# Altium PCB PrimaveraVertical.PcbDoc
Units mm, origin at the board's own origin, x right, y up, seen from the top; angles counter-clockwise.
Board outline 50 x 101.5 mm, 2 copper layers (Top Layer, Bottom Layer); 11 components, 12 nets, 77 pads, 0 vias.
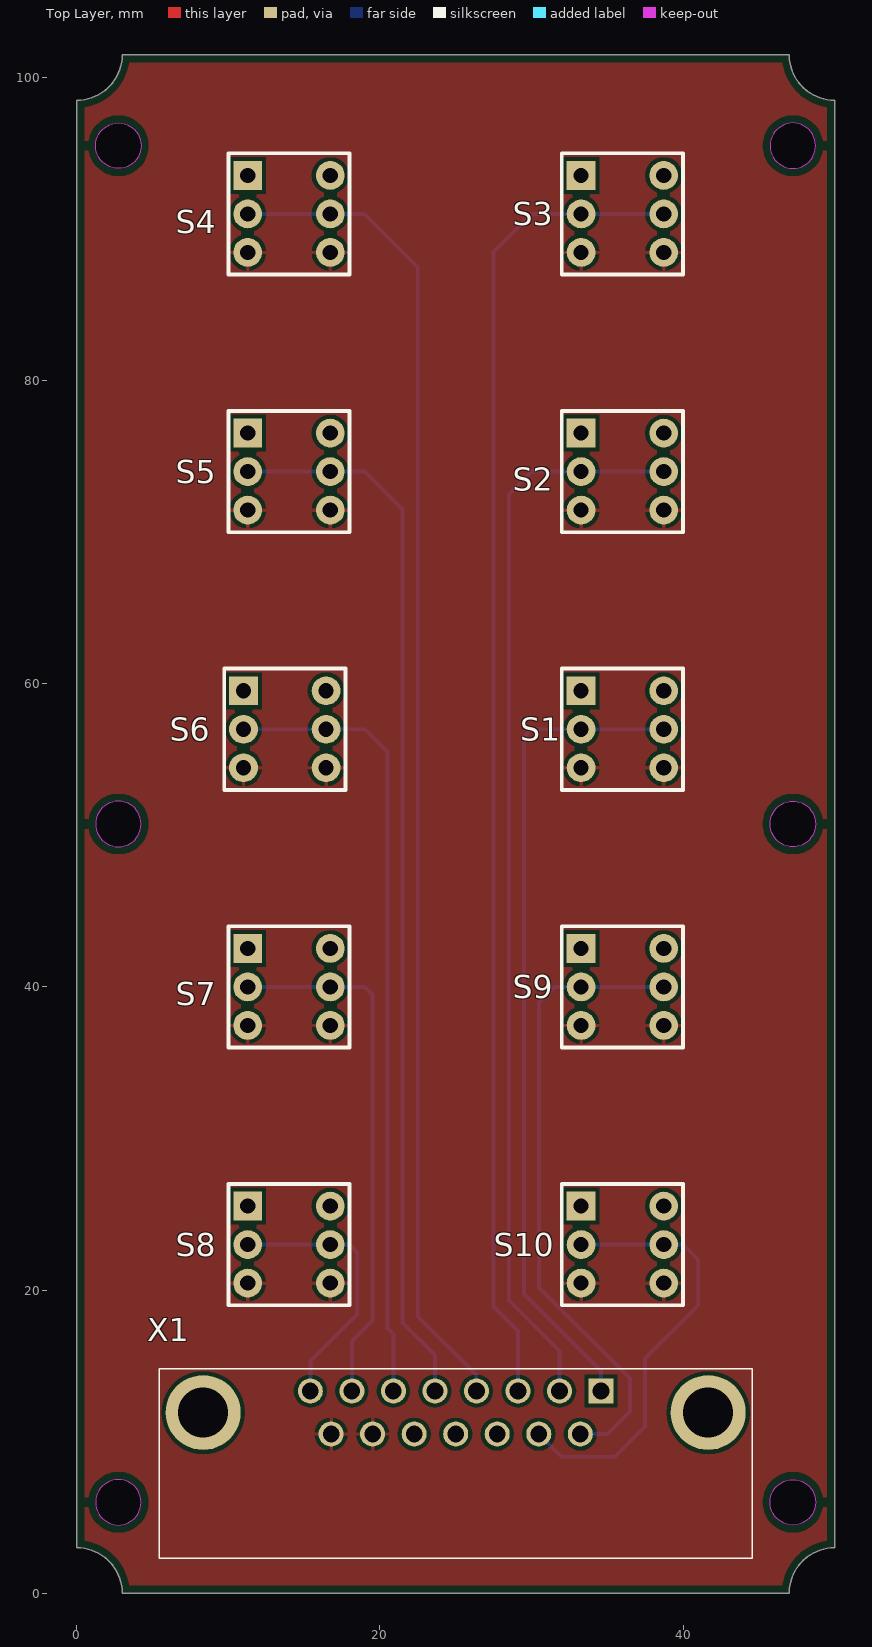
[diagram p0: Top Layer view]
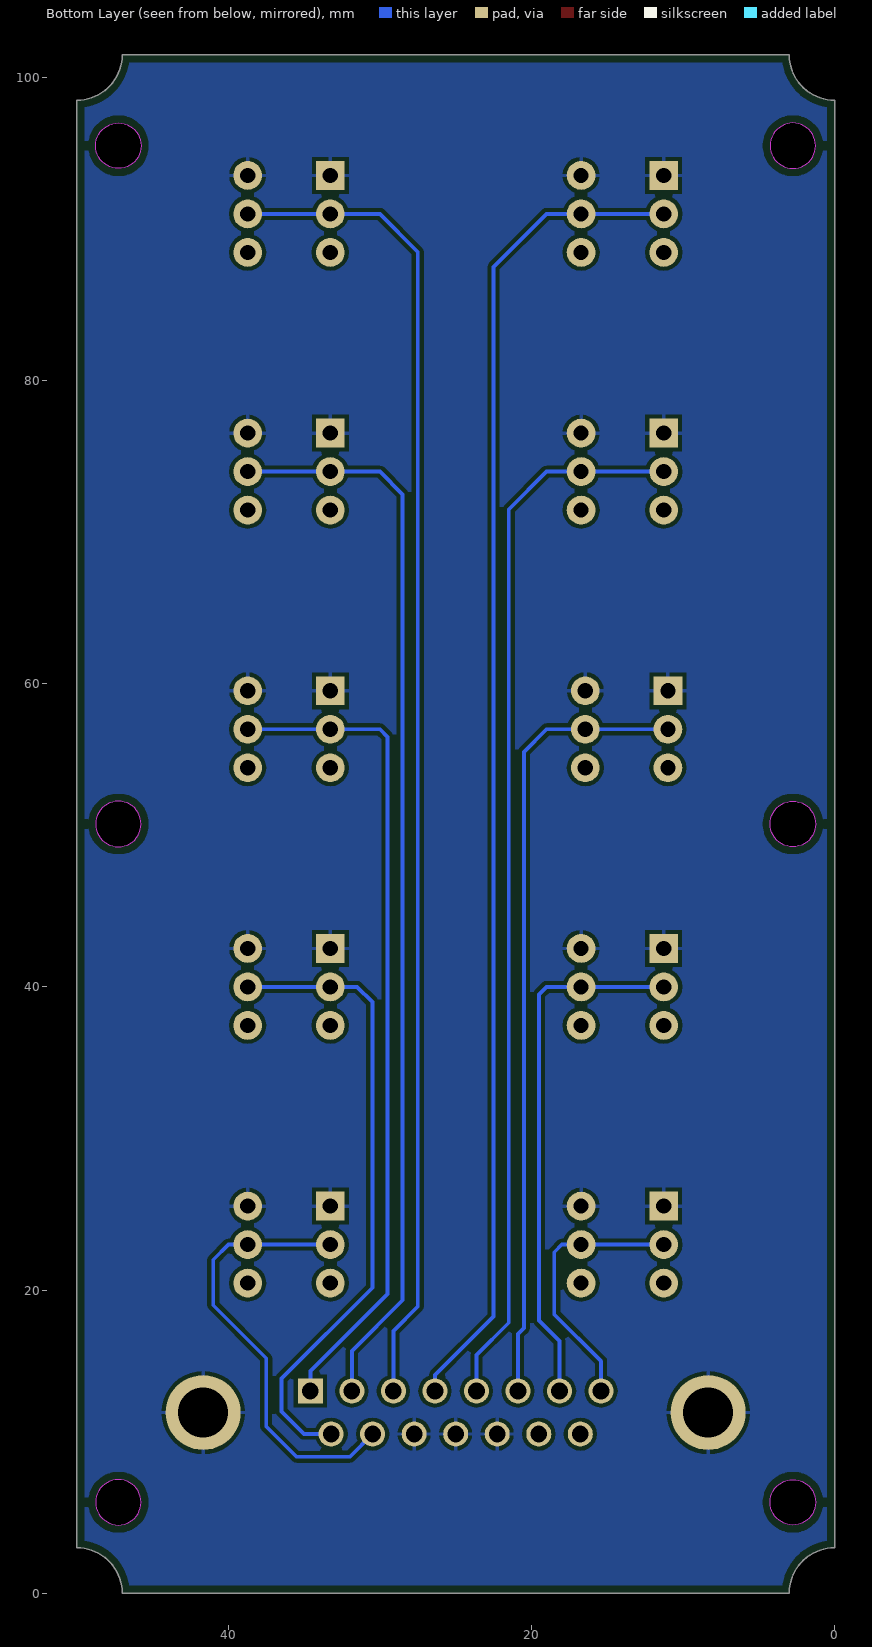
[diagram p1: Bottom Layer view, seen from below]
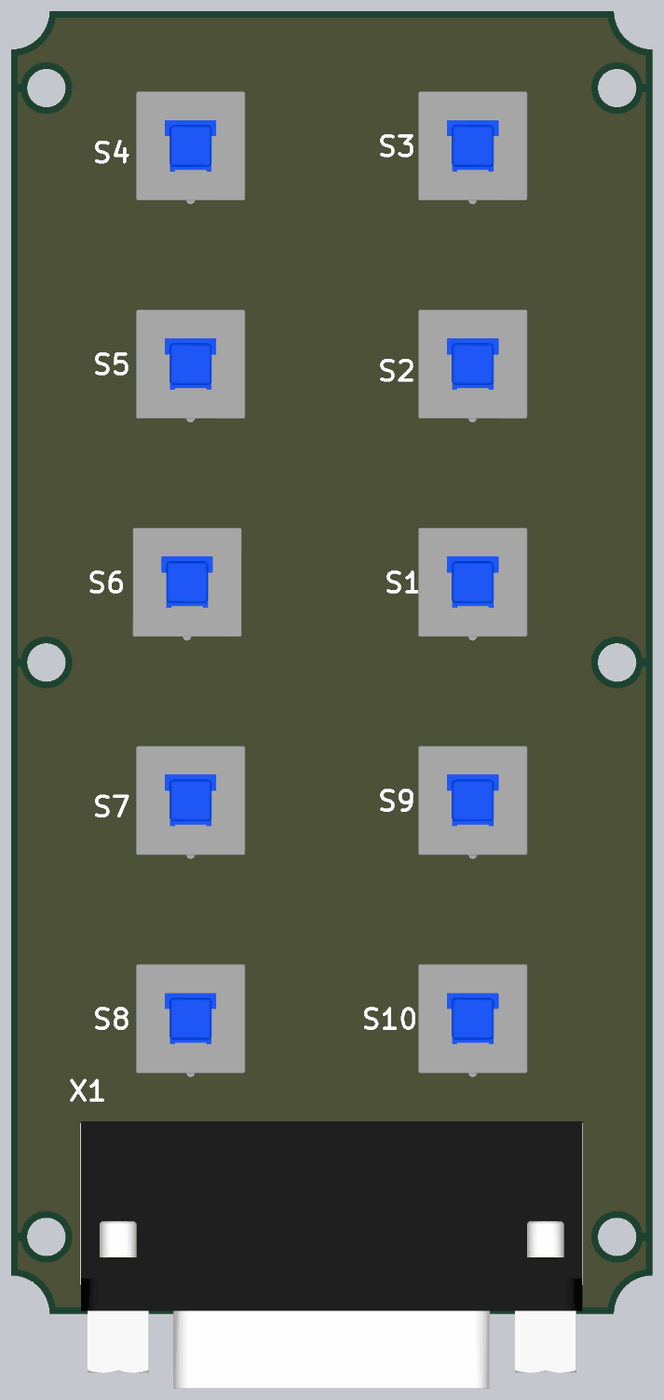
[diagram p2: 3D render of the assembled board from above, using the file's embedded part models]

## Layer stack, top to bottom
Top Solder: solder mask 0.0102, Solder Resist, Dk 3.5
Top Layer: signal copper 0.0356
Dielectric 1: dielectric 0.32, FR-4, Dk 4.8
Bottom Layer: signal copper 0.0356
Bottom Solder: solder mask 0.0102, Solder Resist, Dk 3.5

## Board outline
0,3 0,98.5 ccw(c0,101.5) 3,101.5 47,101.5 ccw(c50,101.5) 50,98.5 50,3 ccw(c50,0) 47,0 3,0 ccw(c0,0)
cut-out: 1.25,50.75 ccw(c2.75,50.75) 2.75,49.25 ccw(c2.75,50.75) 4.25,50.75 ccw(c2.75,50.75) 2.75,52.25 ccw(c2.75,50.75)
cut-out: 48.75,50.75 cw(c47.25,50.75) 47.25,49.25 cw(c47.25,50.75) 45.75,50.75 cw(c47.25,50.75) 47.25,52.25 cw(c47.25,50.75)
cut-out: 48.75,95.5 ccw(c47.25,95.5) 47.25,97 ccw(c47.25,95.5) 45.75,95.5 ccw(c47.25,95.5) 47.25,94 ccw(c47.25,95.5)
cut-out: 48.75,6 cw(c47.25,6) 47.25,4.5 cw(c47.25,6) 45.75,6 cw(c47.25,6) 47.25,7.5 cw(c47.25,6)
cut-out: 1.25,95.5 cw(c2.75,95.5) 2.75,97 cw(c2.75,95.5) 4.25,95.5 cw(c2.75,95.5) 2.75,94 cw(c2.75,95.5)
cut-out: 1.25,6 ccw(c2.75,6) 2.75,4.5 ccw(c2.75,6) 4.25,6 ccw(c2.75,6) 2.75,7.5 ccw(c2.75,6)

## Design rules (kind name [scope] priority, off if disabled: settings)
BoardOutlineClearance [All] p1: gap=0.5 ignorepadtopadclearanceinfootprint=FALSE
Clearance [All] p1: gap=0.254 ignorepadtopadclearanceinfootprint=FALSE
HoleSize [All] p1: absolutevalues=TRUE maxlimit=5 minlimit=0.025 maxpercent=80.000 minpercent=20.000
MinimumSolderMaskSliver [All] p1: minsoldermaskwidth=0.1
PolygonConnect [All] p1: connectstyle=Relief reliefconductorwidth=0.254 reliefentries=4 polygonreliefangle="90 Angle" airgapwidth=0.254
RoutingVias [All] p1: holewidth=0.711 width=1.27 viastyle="Through Hole" minholewidth=0.711 minwidth=1.27 maxholewidth=0.711 maxwidth=1.27
SilkToSolderMaskClearance [IsPad] p1: minsilkscreentomaskgap=0.1 clearancetoexposedcopper=TRUE
SolderMaskExpansion [All] p1: expansion=0.102 istentingtop=FALSE
SupplyNets "Schematic Supply Nets_2" [InNet('11')] p1: voltage=0.000
SupplyNets "Schematic Supply Nets_1" [InNet('+12V')] p2: voltage=0.000
Width [All] p1: maxlimit=0.254 minlimit=0.254 preferedwidth=0.254
27 further rules are at their usual default settings.

## Components (designator, comment, footprint, x,y, rotation, side; value= is the part's Value field where it differs from the comment)
S1 "8.5x8.5 DPDT" 8.5x8.5_DPDT 36,57 r0 top
S2 "8.5x8.5 DPDT" 8.5x8.5_DPDT 36,74 r0 top
S3 "8.5x8.5 DPDT" 8.5x8.5_DPDT 36,91 r0 top
S4 "8.5x8.5 DPDT" 8.5x8.5_DPDT 14,91 r0 top
S5 "8.5x8.5 DPDT" 8.5x8.5_DPDT 14,74 r0 top
S6 "8.5x8.5 DPDT" 8.5x8.5_DPDT 13.725,57 r0 top
S7 "8.5x8.5 DPDT" 8.5x8.5_DPDT 14,40 r0 top
S8 "8.5x8.5 DPDT" 8.5x8.5_DPDT 14,23 r0 top
S9 "8.5x8.5 DPDT" 8.5x8.5_DPDT 36,40 r0 top
S10 "8.5x8.5 DPDT" 8.5x8.5_DPDT 36,23 r0 top
X1 "DSUB15 female" "DSUB15 female" 25,10.5 r0 top

## Footprints (in the part's own frame and the unit in brackets; to place one, negate y for a bottom-side part, rotate by r counter-clockwise, add the part's x,y. Pads: shape width x height; smd on the part's side, far side on the other; paste and mask are expansions set on the pad)
8.5x8.5_DPDT [mm]
  rect 1.9x1.9 hole 1: 1(-2.725,2.54)
  round 1.9 hole 1: 2(-2.725,0) 3(-2.725,-2.54) 4(2.725,2.54) 5(2.725,0) 6(2.725,-2.54)
  silkscreen extent -4,-4 4,4, body extent -4.25,-4.55 4.25,4.25, height 14.1
"DSUB15 female" [mm]
  rect 1.65x1.65 hole 1.1: 1(9.59,2.84)
  round 1.65 hole 1.1: 2(6.85,2.84) 3(4.11,2.84) 4(1.37,2.84) 5(-1.37,2.84) 6(-4.11,2.84) 7(-6.85,2.84) 8(-9.59,2.84) 9(8.22,0) 10(5.48,0) 11(2.74,0) 12(0,0) 13(-2.74,0) 14(-5.48,0) 15(-8.22,0)
  round 4.95 hole 3.3: MH1(-16.66,1.42) MH2(16.66,1.42)
  silkscreen extent -19.55,-8.18 19.55,4.32, body extent -19.57,-16.29 19.57,4.51, height 12.52

## Part data
S1 S2 S3 S4 S5 S6 S7 S8 S9 S10: library part 8.5x8.5_DPDT

## Nets (pads, with @x,y where several pads share a name; then routed paths per layer and width w, separated by ;. In a path a pad name is that pad's centre, name@x,y a point inside that pad or via, vN(x,y) a via of type N, cw(c..) or ccw(c..) an arc to the next point about the centre after c; other vN are vias at no path point)
1: S1.2 S1.5 X1.1 | length 54.7
  Bottom Layer w0.254: X1.1 34.59,14.653 29.5,19.743 29.5,56.5 30,57 S1.2 S1.5
2: S2.2 S2.5 X1.2 | length 71.4
  Bottom Layer w0.254: X1.2 31.85,15.978 28.5,19.328 28.5,72.5 30,74 S2.2 S2.5
3: S3.2 S3.5 X1.3 | length 88.1
  Bottom Layer w0.254: X1.3 29.11,17.304 27.5,18.914 27.5,88.5 30,91 S3.2 S3.5
4: S4.2 S4.5 X1.4 | length 88.4
  Bottom Layer w0.254: S4.2 S4.5 19,91 22.5,87.5 22.5,18.257 26.36,14.397 26.36,13.35 X1.4
5: S5.2 S5.5 X1.5 | length 70.3
  Bottom Layer w0.254: S5.2 S5.5 19,74 21.5,71.5 21.5,17.843 23.63,15.713 X1.5
6: S6.2 S6.5 X1.6 | length 52.2
  Bottom Layer w0.254: S6.2@11.275,57 S6.5 19,57 20.5,55.5 20.5,17.5 20.89,17.11 X1.6
7: S7.2 S7.5 X1.7 | length 35.2
  Bottom Layer w0.254: S7.2 S7.5 19,40 19.5,39.5 19.5,17.985 18.15,16.635 X1.7
8: S8.2 S8.5 X1.8 | length 17.9
  Bottom Layer w0.254: S8.2 S8.5 18,23 18.5,22.5 18.5,18.399 15.41,15.309 X1.8
9: S9.2 S9.5 X1.9 | length 42
  Bottom Layer w0.254: X1.9 35,10.5 36.5,12 36.5,14.157 30.5,20.157 30.5,39 31.5,40 S9.2 S9.5
10: S10.2 S10.5 X1.10 | length 29.1
  Bottom Layer w0.254: X1.10 31.98,9 35.5,9 37.5,11 37.5,15.5 41,19 41,22 40,23 S10.5 S10.2
11: S1.1 S1.4 S2.1 S2.4 S3.1 S3.4 S4.1 S4.4 S5.1 S5.4 S6.1 S6.4 S7.1 S7.4 S8.1 S8.4 S9.1 S9.4 S10.1 S10.4 X1.11 X1.12 X1.13 X1.MH1 X1.MH2
+12V: S1.3 S1.6 S2.3 S2.6 S3.3 S3.6 S4.3 S4.6 S5.3 S5.6 S6.3 S6.6 S7.3 S7.6 S8.3 S8.6 S9.3 S9.6 S10.3 S10.6 X1.14 X1.15

## Polygon pours and split planes (outlines as drawn)
+12V on Top Layer "+12V_L01_P000" (solid, pour order 0): 0,3 0,98.5 ccw(c0,101.5) 3,101.5 47,101.5 ccw(c50,101.5) 50,98.5 50,3 ccw(c50,0) 47,0 3,0 ccw(c0,0)
11 on Bottom Layer "11_L02_P001" (solid, pour order 1): 0,3 0,98.5 ccw(c0,101.5) 3,101.5 47,101.5 ccw(c50,101.5) 50,98.5 50,3 ccw(c50,0) 47,0 3,0 ccw(c0,0)

## Silkscreen, mask and mechanical layers (free items; w line width, h text height)
Mechanical 1:
  the board outline again, w0.001
Mechanical 2:
  lines w0.254: 0,-2 0,3 ; 46,50.75 51,50.75 ; 47,0 52,0 ; 47,101.5 52,101.5 ; 50,-2 50,3

## Dimensions
3,0 to 3,101.5 on Mechanical 2
0,98.5 to 50,98.5 on Mechanical 2